# EAGLE board sensor (EAGLE 7.2.0)
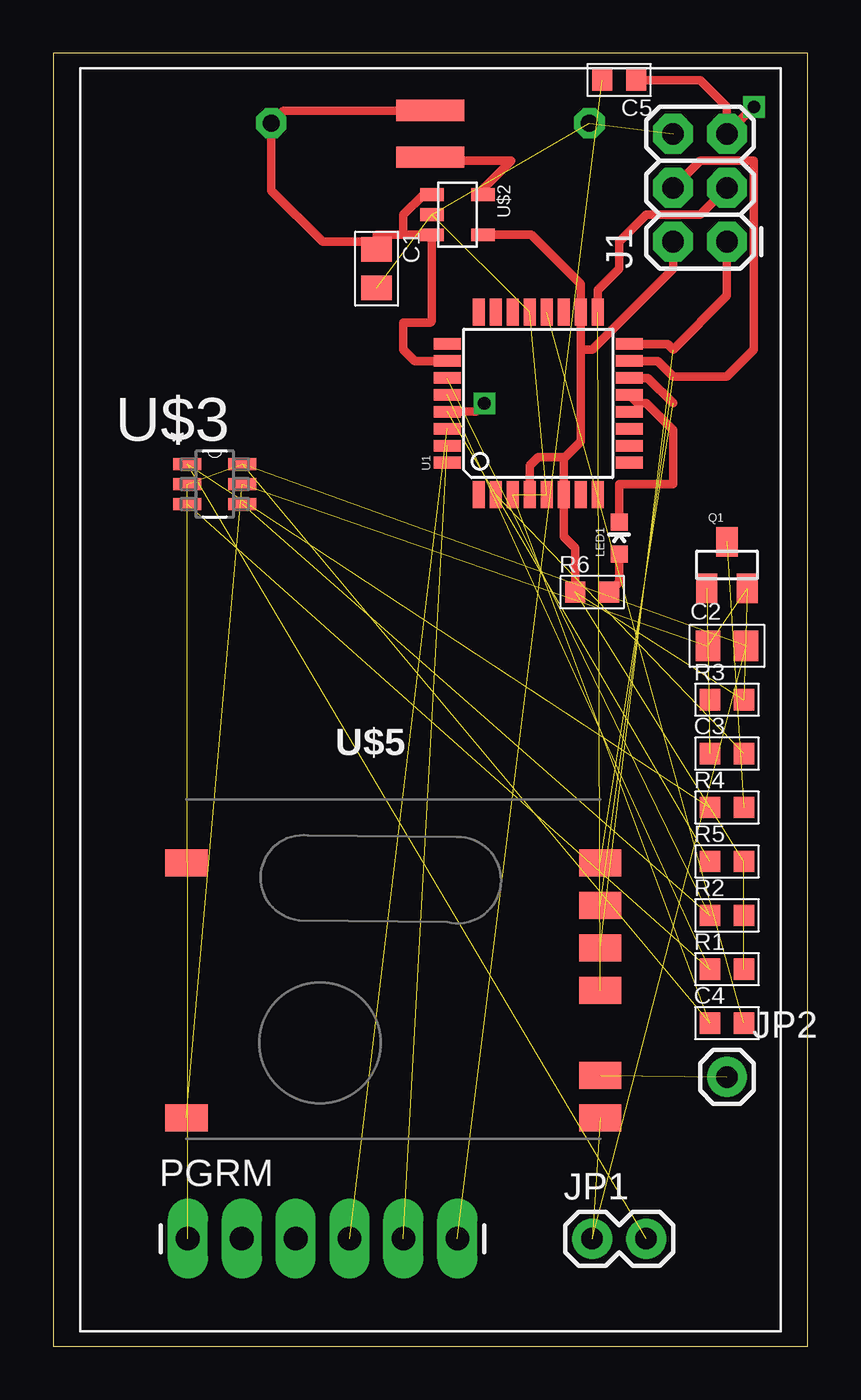
[diagram p0: board, top side]
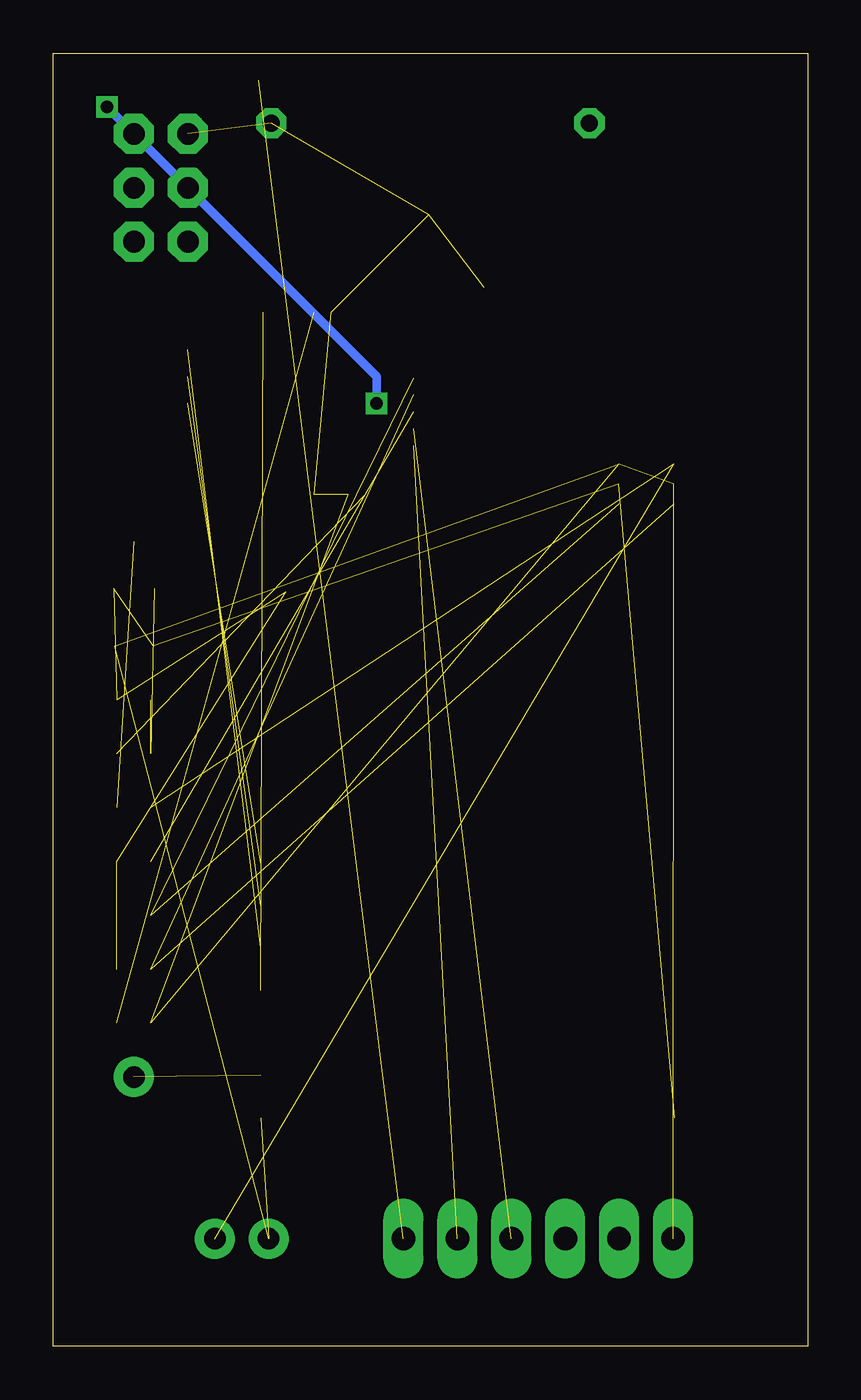
[diagram p1: board, bottom side, seen from below]

Size 35.56 x 60.96 mm. Coordinates in mm from the lower left corner, seen from the top.
Outline: 0,0 35.56,0 35.56,60.96 0,60.96 0,0
Copper layers (1*16): Top 0.035mm / dielectric 1.5mm / Bottom 0.035mm
Design rules "default": minimum track width 10mil, minimum drill 24mil, track to track 8mil, track to pad 8mil, pad to pad 8mil, via to via 8mil, smd to smd 8mil, copper to edge 40mil, drill to drill 8mil, minimum pad ring 10mil, minimum via ring 8mil, stop-mask expansion 4mil, vias tented up to drill 0mil, thermal gap 10mil

## Footprints (pad centres in the part's own frame; a part is rotated, then mirrored left to right if it is on the bottom)
C0805-N = smd 1.15 x 1.45: 1 -0.9,0; 2 0.9,0
C0603-N = smd 0.95 x 1: 1 -0.8,0; 2 0.8,0
2X3 = drill 1.016 pad 1.88 octagon: 1 0,0; 2 0,2.54; 3 2.54,0; 4 2.54,2.54; 5 5.08,0; 6 5.08,2.54
1X02 = drill 1.016 pad 1.88: 1 0,0; 2 2.54,0
1X01 = drill 1.016 pad 1.88: 1 0,0
LED-0603 = smd 0.8 x 0.8: A 0,-0.75; C 0,0.75
1X06_LONGPADS = drill 1.118 pad 1.88 long: 1 0,0; 2 2.54,0; 3 5.08,0; 4 7.62,0; 5 10.16,0; 6 12.7,0
SOT23 = smd 1 x 1.4: 1 -0.95,-1.1; 2 0.95,-1.1; 3 0,1.1
R0603-N = smd 0.95 x 1: 1 -0.8,0; 2 0.8,0
TQFP32-08 = smd 1.27 x 0.559: 1 -4.293,2.8; 2 -4.293,2; 3 -4.293,1.2; 4 -4.293,0.4; 5 -4.293,-0.4; 6 -4.293,-1.2; 7 -4.293,-2; 8 -4.293,-2.8; 17 4.293,-2.8; 18 4.293,-2; 19 4.293,-1.2; 20 4.293,-0.4; 21 4.293,0.4; 22 4.293,1.2; 23 4.293,2; 24 4.293,2.8 | smd 0.559 x 1.27: 9 -2.8,-4.293; 10 -2,-4.293; 11 -1.2,-4.293; 12 -0.4,-4.293; 13 0.4,-4.293; 14 1.2,-4.293; 15 2,-4.293; 16 2.8,-4.293; 25 2.8,4.293; 26 2,4.293; 27 1.2,4.293; 28 0.4,4.293; 29 -0.4,4.293; 30 -1.2,4.293; 31 -2,4.293; 32 -2.8,4.293
KEYSTONEAAHOLDER_2CELL = drill 0.8 pad 1.422 octagon: P$1 -7.493,27.178; P$2 7.493,27.178
SOT23-5 = smd 0.6 x 1.1: P$1 -0.95,-1.2; P$2 0,-1.2; P$3 0.95,-1.2; P$4 0.95,1.2; P$5 -0.95,1.2
SOT95P270X145-6N = smd 1.321 x 0.559: 1 -1.295,0.94; 2 -1.295,0; 3 -1.295,-0.94; 4 1.295,-0.94; 5 1.295,0; 6 1.295,0.94
WURTH_10UH_650MA = smd 3.2 x 1: P$1 0,-1.1; P$2 0,1.1
RFM69W-MINPADS = smd 2 x 1.27: ANA 8,-5; DIO0 -11.5,5; GND 8,-7; MISO 8,1; MOSI 8,3; NSS 8,5; SCK 8,-1; VDD -11.5,-7

## Placement (x,y rotation side)
C1  10uF  [C0805-N]  15.24,50.8 270 top
C2  10uF  [C0805-N]  31.75,33.02 0 top
C3  0.1uF  [C0603-N]  31.75,27.94 0 top
C4  0.1uF  [C0603-N]  31.75,15.24 0 top
C5  0.1uF  [C0603-N]  26.67,59.69 180 top
J1  AVR_SPI_PRG_6PTH  [2X3]  31.75,52.07 90 top
JP1  M02PTH  [1X02]  25.4,5.08 0 top
JP2  M01PTH  [1X01]  31.75,12.7 0 top
LED1  [LED-0603]  26.67,38.1 0 top
PGRM  [1X06_LONGPADS]  6.35,5.08 0 top
Q1  mosfet-N  [SOT23]  31.75,36.83 0 top
R1  10k  [R0603-N]  31.75,17.78 0 top
R2  10k  [R0603-N]  31.75,20.32 0 top
R3  10k  [R0603-N]  31.75,30.48 0 top
R4  [R0603-N]  31.75,25.4 0 top
R5  10k  [R0603-N]  31.75,22.86 0 top
R6  10k  [R0603-N]  25.4,35.56 0 top
U1  ATMEGA328P  [TQFP32-08]  22.86,44.45 90 top
U$1  KEYSTONEAAHOLDER_2CELL  [KEYSTONEAAHOLDER_2CELL]  17.78,30.48 0 top
U$2  TPS61097-33  [SOT23-5]  19.05,53.34 270 top
U$3  MCP3425A0T-E/CH  [SOT95P270X145-6N]  7.62,40.64 0 top
U$4  INDUCTORS_WURTH  [WURTH_10UH_650MA]  17.78,57.15 0 top
U$5  RFM69  [RFM69W-MINPADS]  17.78,17.78 0 top

## Library data of the parts
C1-C5 R1-R6 = passives-7351
J1 JP1 JP2 PGRM = SparkFun-Connectors
LED1 = SparkFun-LED
Q1 = SparkFun-DiscreteSemi; PROD_ID: TRANS-08345
U1 = SparkFun-DigitalIC; PROD_ID: IC-09069
U$1 U$2 U$4 = _my-parts
U$3 = Microchip_By_element14_Batch_1; MPN: MCP3425A0T-E/CH; OC_FARNELL: 1578433; OC_NEWARK: 88M9948; PACKAGE: SOT-6; SUPPLIER: Microchip
U$5 = LowPowerLab

## Nets
D2: U$5.DIO0
GND: C1.2 C2.2 C4.1 J1.6 JP1.1 PGRM.1 U1.3 U1.5 U1.21 U$1.P$2 U$2.P$2 U$3.2 U$3.6 U$5.GND
IRQ: U1.32
MISO: J1.1 U1.16 U$5.MISO
MOSI: J1.4 U1.15 U$5.MOSI
N$1: U$2.P$5 U$4.P$1
N$2: C3.1 Q1.1 R3.1
N$3: JP1.2 R4.1 U$3.1
N$4: C4.2 U1.20
N$6: Q1.3 R4.2
N$7: JP2.1 U$5.ANA
N$8: LED1.C U1.13
N$9: LED1.A R6.2
N$10: C5.2 PGRM.6
RST: C5.1 J1.5 R5.1 U1.29
RX: PGRM.4 U1.30
SCK: J1.3 U1.17 U$5.SCK
SCL: R1.1 U1.28 U$3.3
SDA: R2.1 U1.27 U$3.4
SENS_EN: C3.2 U1.2
SS: U1.14 U$5.NSS
TX: PGRM.5 U1.31
V3.3: C2.1 J1.2 Q1.2 R1.2 R2.2 R3.2 R5.2 R6.1 U1.4 U1.6 U1.18 U$2.P$4 U$3.5 U$5.VDD
VBAT: C1.1 U1.26 U$1.P$1 U$2.P$1 U$2.P$3 U$4.P$2

## Tracks (layer width: path | path; a pad name or v marks a point on that pad's centre or on a via)
GND  (13 unrouted)
MISO  (1 unrouted)
  Top 0.406: U1.16 28.95,47.25 29.21,46.99 31.75,49.53 J1.1
MOSI  (1 unrouted)
  Top 0.406: U1.15 28.48,46.45 29.21,45.72 31.75,45.72 33.02,46.99 33.02,55.88 30.48,55.88 J1.4
N$1
  Top 0.406: U$2.P$5 20.25,54.54 21.59,55.88 17.95,55.88 U$4.P$1
N$2  (2 unrouted)
N$3  (2 unrouted)
N$4  (1 unrouted)
N$6  (1 unrouted)
N$7  (1 unrouted)
N$8
  Top 0.406: LED1.C 26.67,40.64 29.21,40.64 29.21,43.18 27.94,44.45 27.55,44.45 U1.13
N$9
  Top 0.406: LED1.A 26.67,36.03 R6.2
N$10  (1 unrouted)
RST  (via drill 0.6)  (1 unrouted)
  Top 0.406: C5.1 30.48,59.69 31.75,58.42 J1.5 v33.02,58.42 | U1.29 19.92,44.05 v20.32,44.45
  Bottom 0.406: v20.32,44.45 20.32,45.72 v33.02,58.42
RX  (1 unrouted)
SCK  (1 unrouted)
  Top 0.406: U1.17 25.66,49.79 26.67,50.8 26.67,52.07 27.94,53.34 30.48,53.34 J1.3
SCL  (2 unrouted)
SDA  (2 unrouted)
SENS_EN  (1 unrouted)
SS  (1 unrouted)
  Top 0.406: U1.14 28.01,45.65 29.21,44.45
TX  (1 unrouted)
V3.3  (8 unrouted)
  Top 0.406: U$2.P$4 22.54,52.39 24.86,50.07 U1.18 24.86,46.99 | 24.86,46.99 24.86,42.64 24.13,41.91 | 24.13,41.91 24.06,41.84 | 24.06,41.84 U1.6 24.06,38.17 24.6,37.63 R6.1 | 23.99,41.91 22.86,41.91 22.46,41.51 U1.4 | 23.99,41.91 24.06,41.84 | 23.99,41.91 24.13,41.91 | J1.2 29.21,50.8 25.4,46.99 24.86,46.99
VBAT
  Top 0.406: 16.51,52.39 U$2.P$3 17.85,48.33 17.78,48.26 16.51,48.26 16.51,46.99 17.05,46.45 U1.26 | 16.51,52.39 15.24,52.39 C1.1 14.87,52.07 12.7,52.07 10.29,54.48 U$1.P$1 10.88,58.25 U$4.P$2 | U$2.P$1 17.46,54.29 16.51,53.34 16.51,52.39